# Altium PCB powerRegulator.PcbDoc
Units mm, origin at the board's own origin, x right, y up, seen from the top; angles counter-clockwise.
Board outline 19 x 34 mm, 4 copper layers (SIgnal(L1), GND1, GND2, Signal(L4)), stack 1.564 mm thick; 27 components, 14 nets, 81 pads, 33 vias.
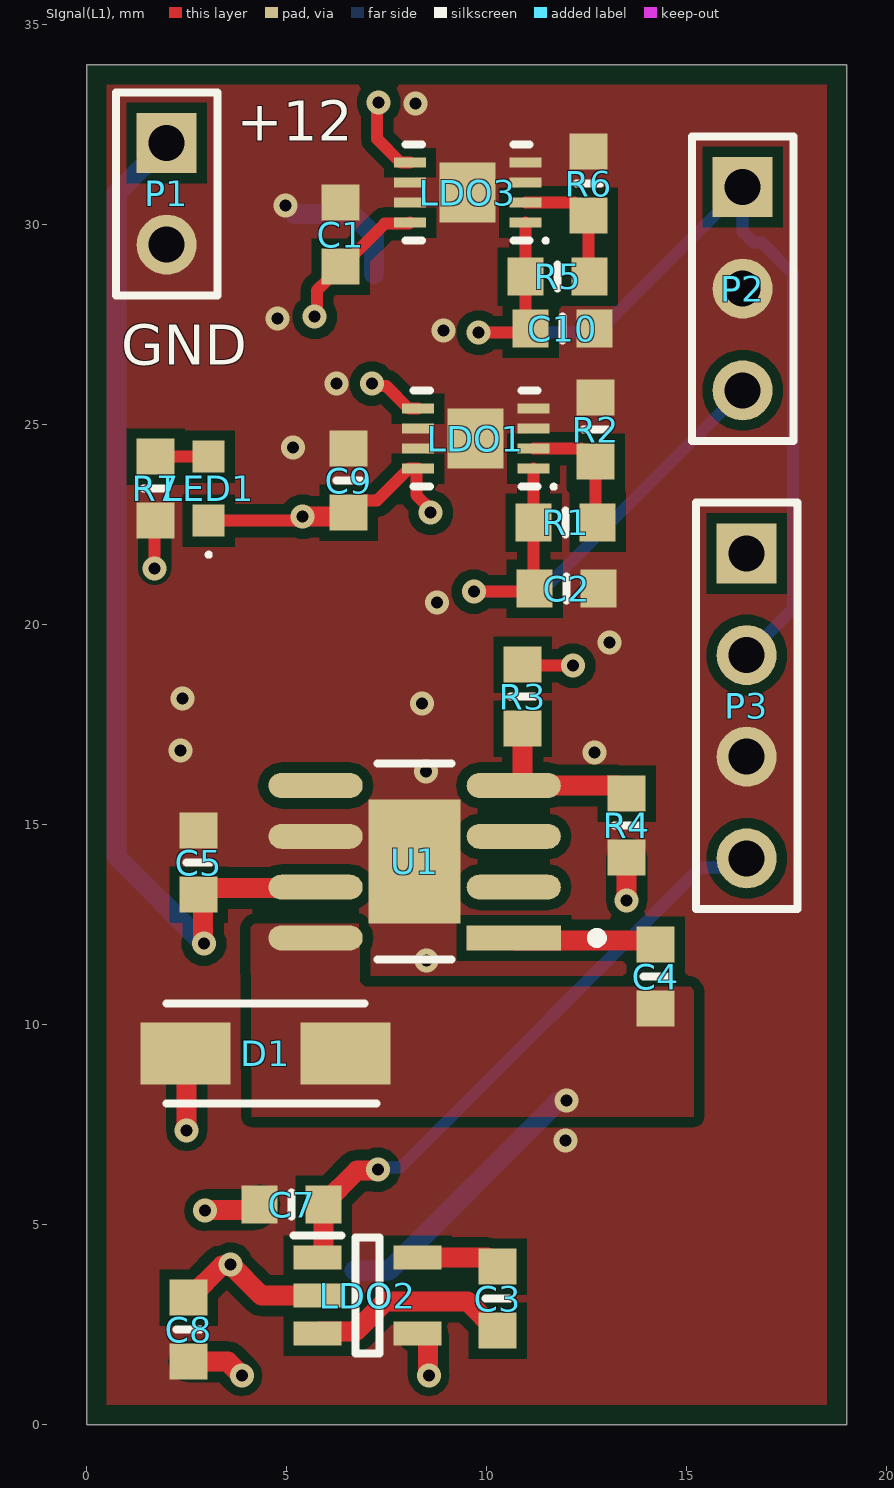
[diagram p0: SIgnal(L1) view]
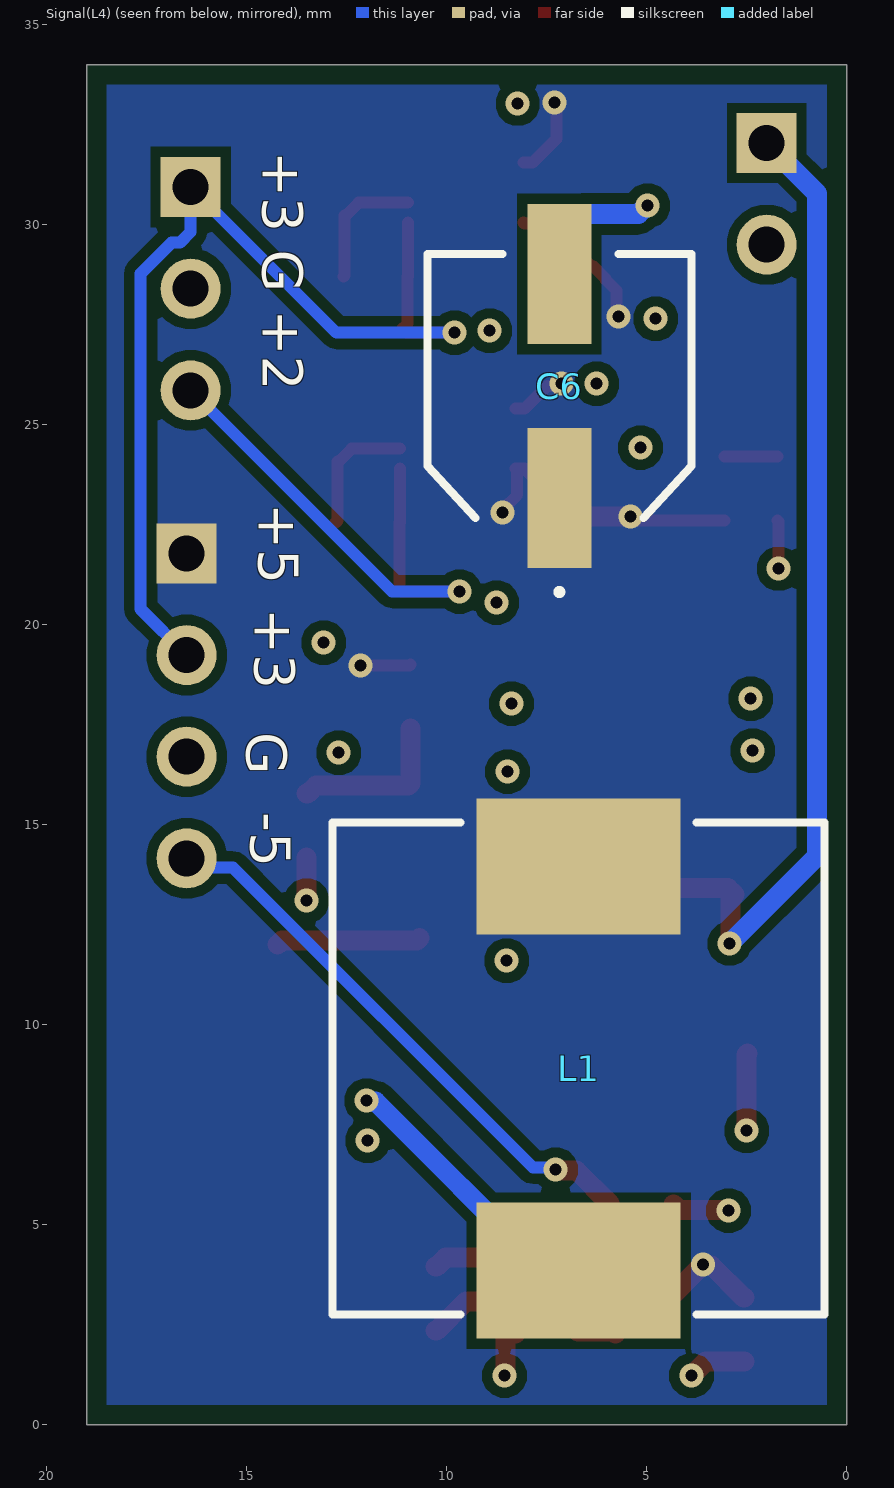
[diagram p1: Signal(L4) view, seen from below]
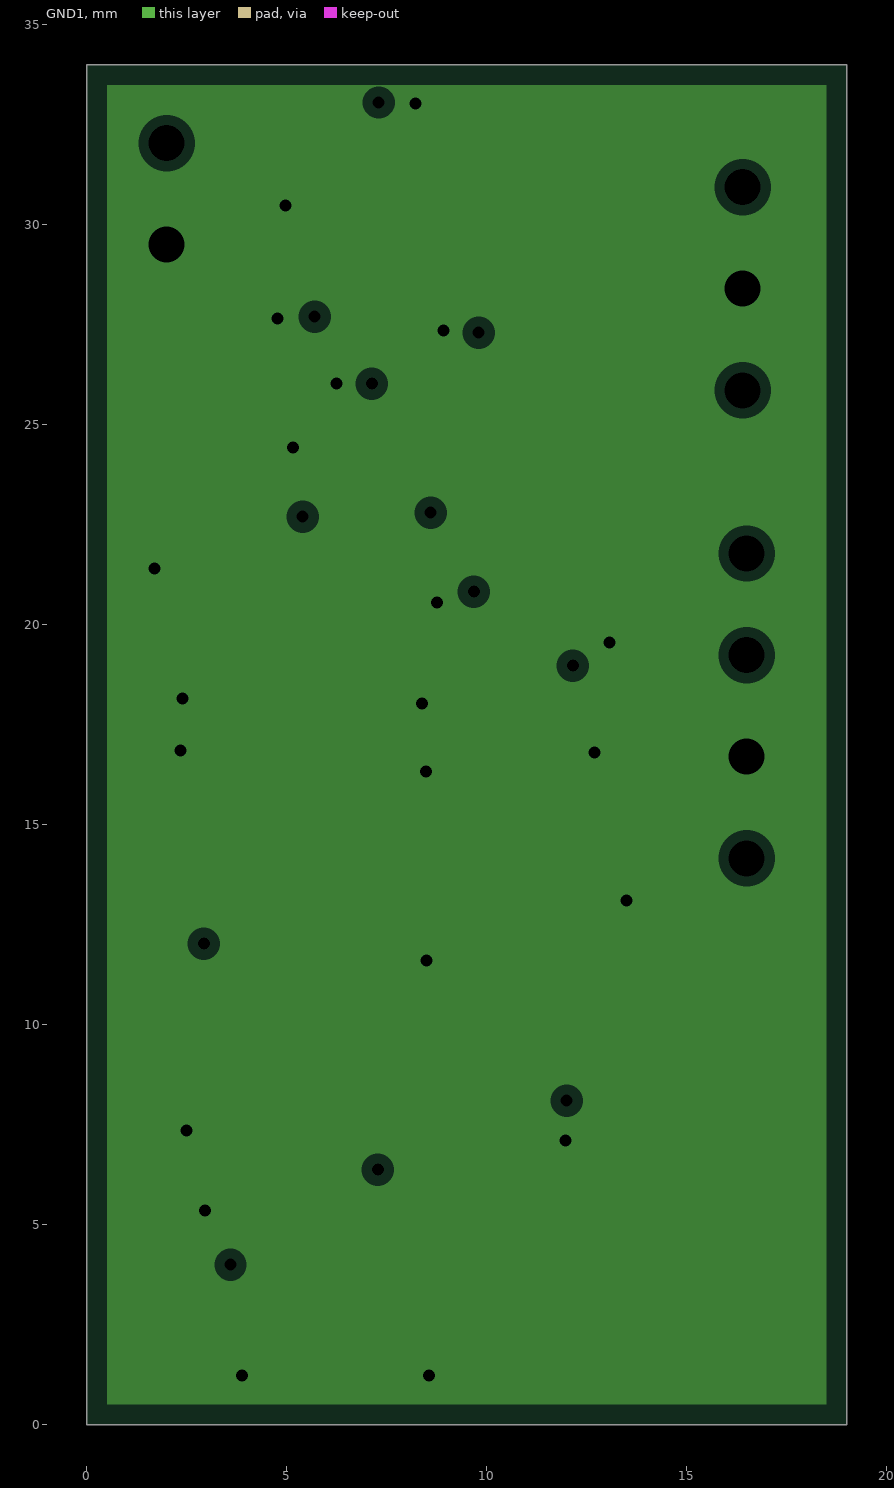
[diagram p2: GND1, clearances drawn from the general rule]
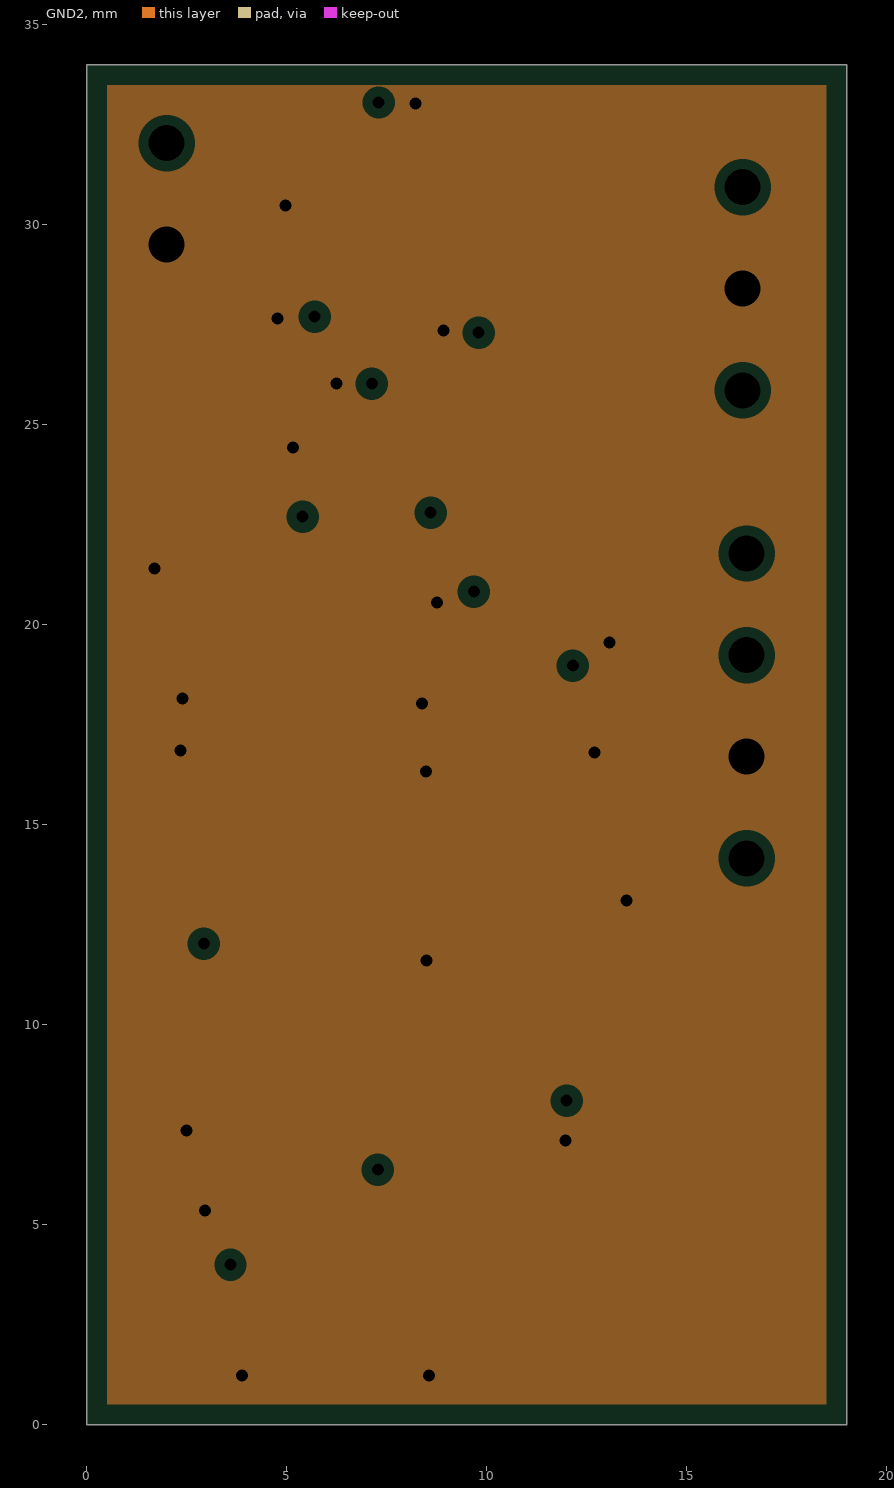
[diagram p3: GND2, clearances drawn from the general rule]
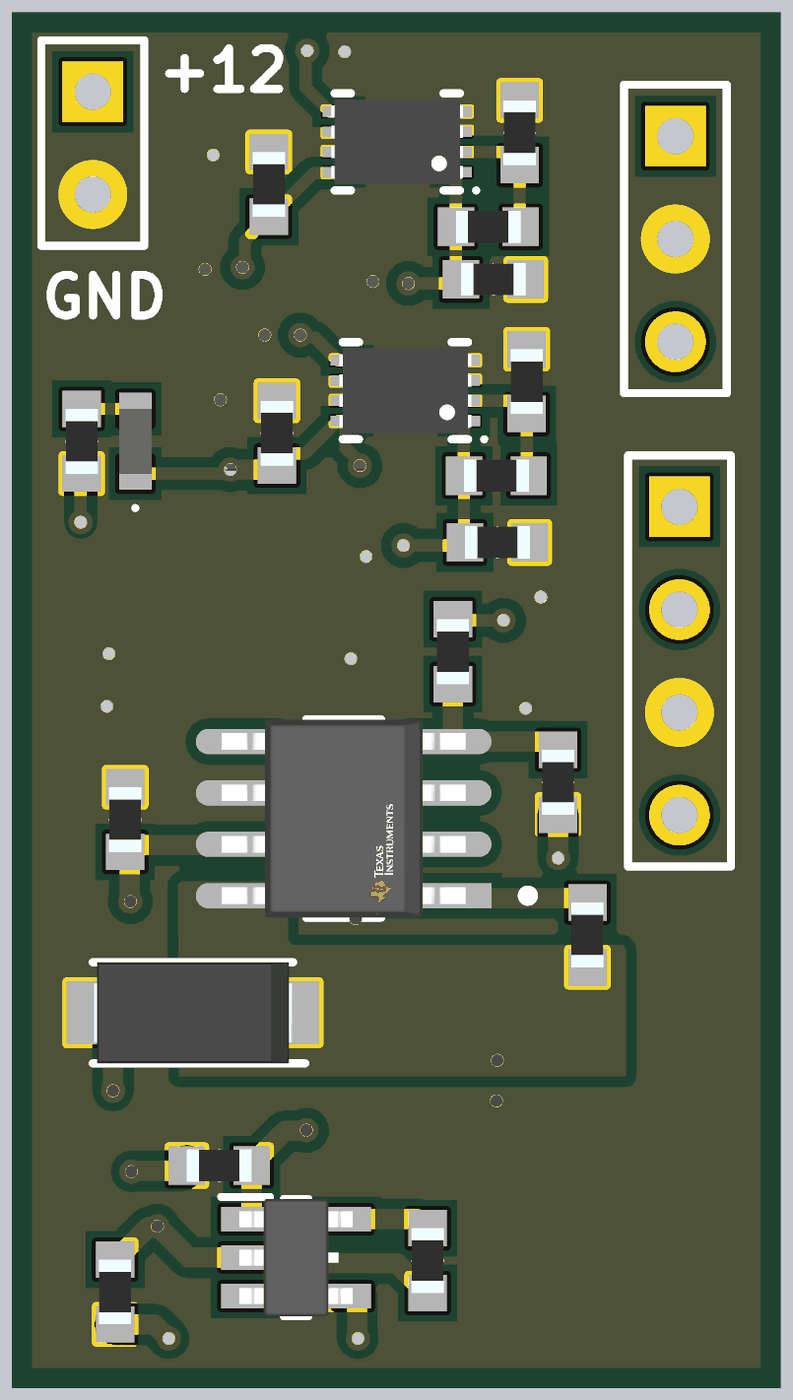
[diagram p4: 3D render of the assembled board from above, using the file's embedded part models]

## Layer stack, top to bottom
Top Solder: solder mask 0.0203, Solder Resist, Dk 3.8
SIgnal(L1): signal copper 0.035
Dielectric 2: prepreg 0.0994, PP-006, Dk 4.05
GND1: plane copper 0.0152, net GND
Dielectric 1: dielectric 1.265, FR-4, Dk 4.6
GND2: plane copper 0.0152, net GND
Dielectric 3: prepreg 0.0994, PP-006, Dk 4.05
Signal(L4): signal copper 0.035
Bottom Solder: solder mask 0.0203, Solder Resist, Dk 3.8

## Board outline
0,0 19,0 19,34 0,34

## Design rules (kind name [scope] priority, off if disabled: settings)
Clearance [All] p1: gap=0.254 ignorepadtopadclearanceinfootprint=TRUE except(0: Arc-Hole Track-Hole SMDPad-Hole THPad-Hole Via-Hole Fill-Hole Poly-Hole Region-Hole Text-Hole; 0.1: Arc-Arc Arc-Track Track-Track; 0.127: SMDPad-SMDPad; 0.2: Arc-SMDPad Track-SMDPad)
HoleSize [All] p1: absolutevalues=TRUE maxlimit=2.54 minlimit=0.2 maxpercent=80.000 minpercent=20.000
HoleToHoleClearance [All] p1: gap=0.5 allowstackedmicrovias=TRUE
MinimumAnnularRing [All] p1: minimumring=0.15
MinimumSolderMaskSliver [All] p1: minsoldermaskwidth=0.05
PlaneClearance [All] p1: clearance=0.254
PlaneConnect [All] p1: planeconnectstyle=Direct reliefexpansion=0.508 reliefentries=4 reliefconductorwidth=0.254 reliefairgap=0.254
PolygonConnect [All] p1: connectstyle=Direct reliefconductorwidth=0.254 reliefentries=4 polygonreliefangle="90 Angle" airgapwidth=0.254
RoutingVias [All] p1: holewidth=0.3 width=0.6 viastyle="Through Hole" minholewidth=0.3 minwidth=0.6 maxholewidth=0.3 maxwidth=0.6
SilkToSilkClearance [All] p1: silktosilkclearance=0.15
SilkToSolderMaskClearance [IsPad] p1: minsilkscreentomaskgap=0.15 clearancetoexposedcopper=TRUE
SolderMaskExpansion [All] p1: expansion=0.102 istentingtop=FALSE
Width [All] p1: maxlimit=1 minlimit=0.2 preferedwidth=0.3
23 further rules are at their usual default settings.

## Components (designator, comment, footprint, x,y, rotation, side; value= is the part's Value field where it differs from the comment)
C1 "0603C" 0603 6.35,29.75 r270 top
C2 "0603C" 0603 12,20.9 r180 top
C3 "0603C" 0603 10.275,3.15 r270 top
C4 "0603C" 0603 14.225,11.2 r90 top
C5 "0603C" 0603 2.8,14.05 r270 top
C6 "16SVPG270MX" SMD_Electro_Cap 7.186,25.968 r180 bottom
C7 "0603C" 0603 5.125,5.5 r0 top
C8 "0603C" 0603 2.55,2.375 r90 top
C9 "0603C" 0603 6.55,23.6 r270 top
C10 "0603C" 0603 11.9,27.4 r180 top
D1 "SS56-HF" DIOM5025X220N 4.475,9.275 r180 top
L1 "Inductor" INDP120120X80N 6.7,8.9 r90 bottom
LDO1 "LDO" LDO 9.725,24.65 r180 top
LDO2 "-5V LDO" -5v_TPS60400DBVR 7.025,3.225 r0 top
LDO3 "LDO" LDO 9.525,30.8 r180 top
LED1 "0603 LED Green" "0603 LED" 3.05,23.4 r90 top
P1 "Header 2" HDR1X2 2,32.04 r270 top
P2 "Header 3" HDR1X3 16.4,30.94 r270 top
P3 "Header 4" HDR1X4 16.5,21.78 r270 top
R1 "R" 0603 11.975,22.55 r0 top
R2 "R" 0603 12.725,24.875 r270 top
R3 "R" 0603 10.9,18.2 r270 top
R4 "R" 0603 13.5,14.975 r270 top
R5 "R" 0603 11.775,28.7 r0 top
R6 "R" 0603 12.55,31.025 r270 top
R7 "R" 0603 1.725,23.4 r90 top
U1 "TPS5430DDA" FP-DDA0008J-IPC_A 8.2,14.075 r180 top

## Footprints (in the part's own frame and the unit in brackets; to place one, negate y for a bottom-side part, rotate by r counter-clockwise, add the part's x,y. Pads: shape width x height; smd on the part's side, far side on the other; paste and mask are expansions set on the pad)
0603 [mm]
  rect 0.9x0.95 smd: 1(-0.8,0) 2(0.8,0)
  body extent -0.8,-0.4 0.8,0.4, height 0.55
"0603 LED" [mm]
  rect 0.8x0.8 smd: 1(-0.8,0) 2(0.8,0)
  silkscreen extent -1.7,-0.05 -1.6,0.05, body extent -0.8,-0.4 0.8,0.4, height 0.9
-5v_TPS60400DBVR [mm]
  rect 1.2x0.6 smd: 1(-1.25,0.95) 2(-1.25,0) 3(-1.25,-0.95) 4(1.25,-0.95) 5(1.25,0.95)
  silkscreen extent -1.85,-1.45 0.3,1.5, body extent -1.4,-1.45 1.4,1.45, height 1.2
DIOM5025X220N [mm]
  rect 2.25x1.55 smd: 1(-2,0) 2(2,0)
  silkscreen extent -2.78,-1.25 2.47,1.25, body extent -2.47,-1.25 2.47,1.25, height 2.2
FP-DDA0008J-IPC_A [mm]
  rect 2.353x0.622 smd paste+0 mask+0: 1(-2.477,1.905)
  rrect100% 2.353x0.622 smd paste+0 mask+0: 2(-2.477,0.635) 3(-2.477,-0.635) 4(-2.477,-1.905) 5(2.477,-1.905) 6(2.477,-0.635) 7(2.477,0.635) 8(2.477,1.905)
  rect 2.3x3.1 smd paste-1000 mask+0: 9(0,0)
  silkscreen extent -4.68,-2.45 0.93,2.45, body extent -4.15,-2.95 4.15,2.95, height 0.25
HDR1X2 [mm] "Connector; Header; 2 Position"
  rect 1.5x1.5 hole 0.9: 1(0,0)
  round 1.5 hole 0.9: 2(2.54,0)
  silkscreen extent -1.27,-1.27 3.81,1.27
HDR1X3 [mm] "Connector; Header; 3 Position"
  rect 1.5x1.5 hole 0.9: 1(0,0)
  round 1.5 hole 0.9: 2(2.54,0) 3(5.08,0)
  silkscreen extent -1.27,-1.27 6.35,1.27
HDR1X4 [mm] "Connector; Header; 4 Position"
  rect 1.5x1.5 hole 0.9: 1(0,0)
  round 1.5 hole 0.9: 2(2.54,0) 3(5.08,0) 4(7.62,0)
  silkscreen extent -1.27,-1.27 8.89,1.27
INDP120120X80N [mm] "Precision Wire Wound Inductor, 2-Leads, Body 12.00x12.00mm, IPC Medium Density"
  rect 3.4x5.1 smd: 1(-5.05,0) 2(5.05,0)
  silkscreen extent -6.15,-6.15 6.15,6.15, body extent -6.1,-6 6.1,6, height 8.1
LDO [mm] "SON, 8-Leads, Body 2.00x3.00mm, Pitch 0.50mm, Thermal Pad 1.50x1.40mm, IPC Medium Density"
  rect 0.8x0.25 smd mask+0.05: 1(-1.445,0.75) 2(-1.445,0.25) 3(-1.445,-0.25) 4(-1.445,-0.75) 5(1.445,-0.75) 6(1.445,-0.25) 7(1.445,0.25) 8(1.445,0.75)
  rect 1.4x1.5 smd mask+0.05: 9(0,0)
  silkscreen extent -2,-1.2 1.55,1.25, body extent -1.63,-1.05 1.63,1.05, height 0.6
SMD_Electro_Cap [mm]
  rect 1.6x3.5 smd: 1(0,-2.8) 2(0,2.8)
  silkscreen extent -3.3,-5.2 3.3,3.3, body extent -3.3,-3.65 3.3,3.65, height 7.91

## Part data
C6: library part SMD_Electro_Cap, "Capacitor Polarised", Manufacturer_Name=Panasonic, Mouser Part Number=667-16SVPG270MX, Arrow Part Number=16SVPG270MX, Arrow Price/Stock=https://www.arrow.com/en/products/16svpg270mx/panasonic?region=nac, Datasheet Link=http://industrial.panasonic.com/cdbs/www-data/pdf/AAB8000/AAB8000C175.pdf, Height=8mm, Manufacturer_Part_Number=16SVPG270MX, Mouser Price/Stock=https://www.mouser.co.uk/ProductDetail/Panasonic/16SVPG270MX?qs=XFmntM7Yc9fZM%2FbqBr2Fvw%3D%3D
D1: "Schottky Diode", Manufacturer_Name="Comchip Technology", Mouser Part Number=750-SS56-HF, Arrow Part Number=SS56-HF, Arrow Price/Stock=https://www.arrow.com/en/products/ss56-hf/comchip-technology, Datasheet Link=https://www.comchiptech.com/admin/files/product/20190806165140.pdf, Height=2.2mm, Manufacturer_Part_Number=SS56-HF, Mouser Price/Stock=https://www.mouser.co.uk/ProductDetail/Comchip-Technology/SS56-HF?qs=GBLSl2AkirtOTzRAa07LTg%3D%3D
L1: library part 33uH, "Inductor Power Shielded Wirewound 470uH 10% 1KHz 18Q-Factor Ferrite 0.18A 3.3Ohm DCR T/R", Case/Package=Nonstandard, Current=2.2A, Current Rating=180mA, DC Resistance (DCR)=3.3R, Inductance=470uH, Manufacturer=Bourns, Manufacturer Part Number=SRR0604-471KL, Max Operating Temperature=125°C, Min Operating Temperature=-40°C, Package Quantity=1000, Resistor Type=Wirewound, Saturation Current=220mA, Self Resonant Frequency=6.5MHz, Test Frequency=1kHz, Tolerance=10%, Category="Fixed Inductors", ComponentLink1Description=https://datasheet.ciiva.com/29348/447222-da-01-en-induktivitaet-srr0604-471kl-470uh-0-22a-29348188.pdf?src-supplier=Conrad, ComponentLink1URL=https://datasheet.ciiva.com/29348/447222-da-01-en-induktivitaet-srr0604-471kl-470uh-0-22a-29348188.pdf?src-supplier=Conrad, ComponentLink2Description=https://datasheet.ciiva.com/6691/srr0604-6691703.pdf?src-supplier=Digi-Key, ComponentLink2URL=https://datasheet.ciiva.com/6691/srr0604-6691703.pdf?src-supplier=Digi-Key, ComponentLink3Description=https://datasheet.ciiva.com/6691/srr0604-6691705.pdf?src-supplier=Digi-Key, ComponentLink3URL=https://datasheet.ciiva.com/6691/srr0604-6691705.pdf?src-supplier=Digi-Key, ComponentLink4Description=https://datasheet.ciiva.com/6691/srr0604-6691708.pdf?src-supplier=Digi-Key, ComponentLink4URL=https://datasheet.ciiva.com/6691/srr0604-6691708.pdf?src-supplier=Digi-Key, ComponentLink5Description=https://datasheet.ciiva.com/8517/srr0604-8517198.pdf?src-supplier=Avnet, ComponentLink5URL=https://datasheet.ciiva.com/8517/srr0604-8517198.pdf?src-supplier=Avnet, ComponentLink6Description=https://datasheet.ciiva.com/31843/srr0604-31843470.pdf?src-supplier=Onlinecomponents.com, ComponentLink6URL=https://datasheet.ciiva.com/31843/srr0604-31843470.pdf?src-supplier=Onlinecomponents.com, Core Material=Ferrite, DC Current=180mA, Depth=6.7mm, Height=4.8mm, Height - Seated (Max)=0.189inch, Length=6.5mm, Max DC Current=180mA, Military Standard=Not, Mount="Surface Mount", Packaging="Tape and Reel", Pricing 1="1=0.93000, 10=0.67800, 50=0.67800, 100=0.62800, 1000=0.41200, 10000=0.38700 (USD)", Q Factor=18, Radiation Hardening=No, RoHS=Yes, Shielding=Shielded, Stock 1=1611, Supplier 1=Mouser, Termination=SMD/SMT, Width=6.5mm
LDO1 LDO3: "IC REG LDO ADJ 0.3A 8VSON", Dropout Voltage=450mV, Input Bias Current=600uA, Manufacturer=Rohm, Manufacturer Part Number=BD00GA3WNUX-TR, Max Input Voltage=14V, Max Operating Temperature=85°C, Max Output Current=300mA, Max Power Dissipation=2.11W, Min Input Voltage=4.5V, Min Operating Temperature=-25°C, Output Voltage=13V, Package Quantity=4000, Reference Voltage=800mV, Category="Voltage Regulators - Linear", ComponentLink1Description=https://datasheet.ciiva.com/29570/bdxxga3wefj-e-29570298.pdf?src-supplier=Digi-Key, ComponentLink1URL=https://datasheet.ciiva.com/29570/bdxxga3wefj-e-29570298.pdf?src-supplier=Digi-Key, ComponentLink2Description=https://datasheet.ciiva.com/29570/bdxxga3wefj-e-29570299.pdf?src-supplier=Digi-Key, ComponentLink2URL=https://datasheet.ciiva.com/29570/bdxxga3wefj-e-29570299.pdf?src-supplier=Digi-Key, ComponentLink3Description=https://datasheet.ciiva.com/29570/bdxxga3wefj-e-29570297.pdf?src-supplier=Digi-Key, ComponentLink3URL=https://datasheet.ciiva.com/29570/bdxxga3wefj-e-29570297.pdf?src-supplier=Digi-Key, Lead Free="Lead Free", Mount="Surface Mount", Number of Outputs=1, Number of Regulators=1, Output Current=300mA, Output Type=Adjustable, Packaging="Tape and Reel", Pricing 1="1=0.73000, 10=0.64100, 50=0.64100, 100=0.49100, 1000=0.31100, 10000=0.25600 (USD)", RoHS=Yes, RoHS Compliant=Yes, Stock 1=2744, Supplier 1=Mouser
LDO2: "Integrated Circuit", Arrow Part Number=TPS60400DBVR, Manufacturer_Name="Texas Instruments", Mouser Part Number=595-TPS60400DBVR, Arrow Price/Stock=https://www.arrow.com/en/products/tps60400dbvr/texas-instruments?region=nac, Datasheet Link=http://www.ti.com/general/docs/suppproductinfo.tsp?distId=10&gotoUrl=http%3A%2F%2Fwww.ti.com%2Flit%2Fgpn%2Ftps60400, Height=1.45mm, Manufacturer_Part_Number=TPS60400DBVR, Mouser Price/Stock=https://www.mouser.co.uk/ProductDetail/Texas-Instruments/TPS60400DBVR?qs=Gse6rAGbi7%2F9%252BEuIQ%2FZFVA%3D%3D
LED1: "LED", Manufacturer_Name="Wurth Elektronik", Manufacturer_Part_Number=150060VS75003, Mouser Part Number=710-150060VS75003, Datasheet Link=https://www.we-online.com/catalog/datasheet/150060VS75003.pdf, Height=0.8mm, Mouser Price/Stock=https://www.mouser.co.uk/ProductDetail/Wurth-Elektronik/150060VS75003?qs=Li%252BoUPsLEnv2ZkbQUMi3uQ%3D%3D
P1: "Header, 2-Pin", LatestRevisionDate=17-Jul-2002, LatestRevisionNote="Re-released for DXP Platform.", Publisher="Altium Limited"
P2: "Header, 3-Pin", LatestRevisionDate=17-Jul-2002, LatestRevisionNote="Re-released for DXP Platform.", Publisher="Altium Limited"
P3: "Header, 4-Pin", LatestRevisionDate=17-Jul-2002, LatestRevisionNote="Re-released for DXP Platform.", Publisher="Altium Limited"
R1 R2 R3 R4 R5 R6 R7: library part 0603R
U1: library part BUCK_CMP-2000-04960-2, "IC REG BUCK ADJUSTABLE 3A 8SOPWR", Manufacturer="Texas Instruments", Max Junction Temp=+125°C, Max Supply Voltage=36V, Min Supply Voltage=5.5V, Nominal Supply Current=3mA, Output Current=3A, Output Voltage=1.23-31V, Package=DDA0008J, Switching Frequency=500kHz, Temperature="-40°C to +125°C", Temperature Range Low=-40°C, Automotive=No, Category=IC, ComponentLink2Description=Datasheet, ComponentLink2URL=http://www.ti.com/lit/ds/symlink/tps5431.pdf, Device Class L1="Integrated Circuits (ICs)", Device Class L2="Power Management ICs", Device Class L3="Voltage Regulators - Switching", Digikey Description="IC REG BUCK ADJUSTABLE 3A 8SOPWR", Height=1.7mm, Lead Free=Yes, Manufacturer Part Number=TPS5430DDA, Max Duty Cycle=89%, Mouser Description="Voltage Regulators - Switching Regulators 5.5 to 36V Input 3A Step Dwn Converter", Number of Outputs=1, Octopart=https://octopart.com/tps5430dda-texas+instruments-589977, Output Type=AdjustableProgrammable, RoHS=TRUE, Standoff Height=0mm, Switching Topology=Buck, Temperature Range High=+125°C

## Via types
v1: diameter 0.6, hole 0.3, SIgnal(L1) to Signal(L4), tented top, 33 vias

## Nets (pads, with @x,y where several pads share a name; then routed paths per layer and width w, separated by ;. In a path a pad name is that pad's centre, name@x,y a point inside that pad or via, vN(x,y) a via of type N, cw(c..) or ccw(c..) an arc to the next point about the centre after c; other vN are vias at no path point)
+2V5: C2.2 LDO1.1 P2.3 R1.1 | length 13.4
  SIgnal(L1) w0.3: v1(9.678,20.825) 11.125,20.825 C2.2 11.175,20.925 R1.1 11.17,22.555 LDO1.1
  Signal(L4) w0.3: v1(9.678,20.825) 11.365,20.825 P2.3
+3V3: C10.2 LDO3.1 P2.1 P3.2 R5.1 | length 25
  SIgnal(L1) w0.3: v1(9.8,27.3) 11,27.3 C10.2 10.975,27.525 R5.1 10.97,28.705 LDO3.1
  Signal(L4) w0.3: v1(9.8,27.3) 12.76,27.3 P2.1 16.4,29.82 16.666,29.554 16.878,29.554 17.654,28.778 17.654,20.394 P3.2
+5V: C1.2 C6.1 C8.2 C9.2 L1.2 LDO1.5 LDO1.8 LDO2.2 LDO3.5 LDO3.8 LED1.1 P3.1 R3.1 | length 19.3
  SIgnal(L1) w0.3: LED1.1 5.219,22.6 5.319,22.7 v1(5.4,22.7) ; v1(5.7,27.7) 5.757,27.757 5.757,28.357 6.025,28.625 6.025,28.65 6.325,28.95 C1.2 6.375,28.95 7.45,30.025 8.055,30.025 LDO3.8 ; C9.2@6.45,22.7 C9.2 6.85,23.1 7.255,23.1 8.055,23.9 LDO1.8 ; v1(7.128,26.025) 7.186,25.968 7.487,25.968 8.055,25.4 LDO1.5 ; v1(7.3,33.054) 7.261,33.015 7.261,32.144 7.855,31.55 LDO3.5 ; LDO1.8@8.24,23.875 8.24,23.241 8.6,22.881 v1(8.6,22.8) ; R3.1 10.925,18.975 v1(12.153,18.975)
  SIgnal(L1) w0.5: C8.2 2.575,3.175 3.381,3.981 3.577,3.981 v1(3.596,4) ; v1@3.6,4 3.6,3.996 4.371,3.225 LDO2.2 ; v1(5.4,22.7) C9.2@6.45,22.7
+12V: C5.2 P1.1 U1.7 | length 25.7
  SIgnal(L1) w0.5: v1(2.928,12.025) 2.909,12.044 2.909,13.141 C5.2 2.967,13.417 5.7,13.417 U1.7
  Signal(L4) w0.5: P1.1 0.746,30.786 0.746,14.208 v1(2.928,12.025)
-5V: C7.2 LDO2.1 P3.4 | length 15.6
  SIgnal(L1) w0.5: LDO2.1 5.875,4.175 5.925,4.225 C7.2 5.925,5.525 6.756,6.356 7.259,6.356 v1(7.278,6.375)
  Signal(L4) w0.3: v1(7.278,6.375) 7.336,6.433 7.848,6.433 15.346,13.93 16.27,13.93 P3.4
BUCK_BOOT: C4.2 U1.1 | length 3.6
  SIgnal(L1) w0.5: U1.1 10.738,12.109 14.116,12.109 C4.2
BUCK_PH: C4.1 D1.1 L1.1 U1.8 | length 7.1
  Signal(L4) w0.5: L1.1 7.55,3.85 11.781,8.081 11.981,8.081 v1(12,8.1)
BUCK_VSENS: R3.2 R4.1 U1.4 | length 4.1
  SIgnal(L1) w0.5: R3.2 10.9,16.03 10.95,15.98 13.27,15.98 13.475,15.775 R4.1
CFLY_IN: C3.2 LDO2.3 | length 5.1
  SIgnal(L1) w0.5: LDO2.3 5.825,2.325 6.712,2.325 7.466,3.079 9.521,3.079 10.25,2.35 C3.2
CFLY_OUT: C3.1 LDO2.5 | length 2.1
  SIgnal(L1) w0.5: LDO2.5 10.025,4.175 10.25,3.95 C3.1
GND: C1.1 C2.1 C5.1 C6.2 C7.1 C8.1 C9.1 C10.1 D1.2 LDO1.3 LDO1.4 LDO1.6 LDO1.7 LDO1.9 LDO2.4 LDO3.3 LDO3.4 LDO3.6 LDO3.7 LDO3.9 P1.2 P2.2 P3.3 R2.1 R4.2 R6.1 R7.1 U1.6 U1.9 | length 11.9
  SIgnal(L1) w0.3: v1(1.7,21.4) 1.7,22.575 R7.1
  SIgnal(L1) w0.5: D1.2 2.5,9.25 v1(2.5,7.35) ; C8.1 3.529,1.575 v1(3.878,1.225) ; v1(2.953,5.35) 2.973,5.369 4.194,5.369 C7.1 ; LDO2.4 8.484,2.275 8.534,2.225 8.534,1.244 v1(8.553,1.225) ; v1(13.5,13.1) R4.2
  Signal(L4) w0.5: v1(4.975,30.475) 5.002,30.475 5.209,30.268 6.636,30.268 7.186,29.718 C6.2
  other v1: 11.975,7.1 8.5,11.6 8.478,16.325 12.7,16.8 2.35,16.85 8.378,18.025 2.4,18.15 13.075,19.55 8.753,20.55 5.153,24.425 6.25,26.025 8.925,27.35 4.775,27.65 8.225,33.025
LDO_2V5_VOS: LDO1.2 R1.2 R2.2 | length 3.2
  SIgnal(L1) w0.3: LDO1.2 12.375,24.4 12.7,24.075 R2.2 12.725,22.6 R1.2
LDO_3V3_VOS: LDO3.2 R5.2 R6.2 | length 3.2
  SIgnal(L1) w0.3: LDO3.2 12.2,30.55 12.525,30.225 R6.2 12.55,28.725 R5.2
LED_N: LED1.2 R7.2 | length 1.3
  SIgnal(L1) w0.3: R7.2 LED1.2
pads on no net: U1.2 U1.3 U1.5

## Polygon pours and split planes (outlines as drawn)
GND on SIgnal(L1) "GND_L01_P004" (solid, pour order 4): 0.5,33.5 18.5,33.5 18.5,0.5 0.5,0.5
BUCK_PH on SIgnal(L1) "BUCK_PH_L01_P000" (solid, pour order 0): 4.1,12.525 6.825,12.525 6.825,11.075 6.95,10.95 15.1,10.95 15.15,11 15.175,10.975 15.175,7.7 4.125,7.7
+5V on Signal(L4) "+5V_L04_P003" (solid, pour order 3): 0.5,33.5 18.5,33.5 18.5,0.5 0.5,0.5
GND on GND2 (split plane): 18.49,0.51 0.51,0.51 0.51,33.49 18.49,33.49
GND on GND1 (split plane): 18.49,0.51 0.51,0.51 0.51,33.49 18.49,33.49

## Silkscreen, mask and mechanical layers (free items; w line width, h text height)
Top Overlay:
  text "+12" at 3.75,32.1 h1
  text "GND" at 0.867,26.5 h1
Bottom Overlay:
  text "+3 G +2" at 14.6,31.832 h1 r90
  text "+5" at 14.7,23.033 h1 r90
  text "+3" at 14.797,20.409 h1 r90
  text "G" at 14.997,17.309 h1 r90
  text "-5" at 14.897,15.309 h1 r90